# EAGLE board CT_schematic (EAGLE 7.6.0)

Size 100 x 80 mm. Coordinates in mm from the lower left corner, seen from the top.
Outline: 0,0 100,0 100,80 0,80 0,0
Copper layers (1*16): Top 0.035mm / dielectric 1.5mm / Bottom 0.035mm
Design rules "default": minimum track width 10mil, minimum drill 24mil, track to track 8mil, track to pad 8mil, pad to pad 8mil, via to via 8mil, smd to smd 8mil, copper to edge 40mil, drill to drill 8mil, minimum pad ring 10mil, minimum via ring 8mil, stop-mask expansion 4mil, vias tented up to drill 0mil, thermal gap 10mil

## Footprints (pad centres in the part's own frame; a part is rotated, then mirrored left to right if it is on the bottom)
C0603 = smd 0.8 x 0.8: 1 -0.762,0; 2 0.762,0
C0402 = smd 0.5 x 0.5: 1 -0.508,0; 2 0.508,0
C0805 = smd 1.2 x 1.3: 1 -1.016,0; 2 1.016,0
C1206 = smd 1.3 x 1.6: 1 -1.524,0; 2 1.524,0
L0603 = smd 0.8 x 0.8: 1 -0.762,0; 2 0.762,0
L0805 = smd 1.2 x 1.3: 1 -1.016,0; 2 1.016,0
R0603 = smd 0.8 x 0.8: 1 -0.762,0; 2 0.762,0
LQFP64 = smd 0.3 x 1.2: 1 -3.75,-5.75; 2 -3.25,-5.75; 3 -2.75,-5.75; 4 -2.25,-5.75; 5 -1.75,-5.75; 6 -1.25,-5.75; 7 -0.75,-5.75; 8 -0.25,-5.75; 9 0.25,-5.75; 10 0.75,-5.75; 11 1.25,-5.75; 12 1.75,-5.75; 13 2.25,-5.75; 14 2.75,-5.75; 15 3.25,-5.75; 16 3.75,-5.75; 33 3.75,5.75; 34 3.25,5.75; 35 2.75,5.75; 36 2.25,5.75; 37 1.75,5.75; 38 1.25,5.75; 39 0.75,5.75; 40 0.25,5.75; 41 -0.25,5.75; 42 -0.75,5.75; 43 -1.25,5.75; 44 -1.75,5.75; 45 -2.25,5.75; 46 -2.75,5.75; 47 -3.25,5.75; 48 -3.75,5.75 | smd 1.2 x 0.3: 17 5.75,-3.75; 18 5.75,-3.25; 19 5.75,-2.75; 20 5.75,-2.25; 21 5.75,-1.75; 22 5.75,-1.25; 23 5.75,-0.75; 24 5.75,-0.25; 25 5.75,0.25; 26 5.75,0.75; 27 5.75,1.25; 28 5.75,1.75; 29 5.75,2.25; 30 5.75,2.75; 31 5.75,3.25; 32 5.75,3.75; 49 -5.75,3.75; 50 -5.75,3.25; 51 -5.75,2.75; 52 -5.75,2.25; 53 -5.75,1.75; 54 -5.75,1.25; 55 -5.75,0.75; 56 -5.75,0.25; 57 -5.75,-0.25; 58 -5.75,-0.75; 59 -5.75,-1.25; 60 -5.75,-1.75; 61 -5.75,-2.25; 62 -5.75,-2.75; 63 -5.75,-3.25; 64 -5.75,-3.75
SOIC-8 = smd 1.6 x 0.6: 1 -2.7,1.905 | smd 1.55 x 0.6: 2 -2.7,0.635; 3 -2.7,-0.635; 4 -2.7,-1.905; 5 2.7,-1.905; 6 2.7,-0.635; 7 2.7,0.635; 8 2.7,1.905
SAMTEC_FTSH-105-01-L-DV-K = smd 0.762 x 2.794: 1 -2.54,-2.032; 2 -2.54,2.032; 3 -1.27,-2.032; 4 -1.27,2.032; 5 0,-2.032; 6 0,2.032; 7 1.27,-2.032; 8 1.27,2.032; 9 2.54,-2.032; 10 2.54,2.032
182-009-MALE = drill 1.194 pad 1.524 octagon: 1 -5.537,10.923; 2 -2.769,10.923; 3 0,10.923; 4 2.769,10.923; 5 5.537,10.923; 6 -4.153,8.08; 7 -1.384,8.08; 8 1.384,8.08; 9 4.153,8.08 | hole 3.048: -12.446,9.501; 12.446,9.501
ABS07-32.768KHZ-7-T = smd 1.1 x 2.4: 1 -2.5,0; 2 0,0
ABLS-25.000MHZ-B2F-T = smd 5.6 x 2.8: 1 -3.81,0; 2 5.69,0
TSOT-23-5 = smd 1.3 x 0.62: 1 -1.31,0.95; 2 -1.31,0; 3 -1.31,-0.95; 4 1.31,-0.95; 5 1.31,0.95
DFN8_2X3MC = smd 0.813 x 0.305: 1 -1.398,0.75; 2 -1.398,0.25; 3 -1.398,-0.25; 4 -1.398,-0.75; 5 1.398,-0.75; 6 1.398,-0.25; 7 1.398,0.25; 8 1.398,0.75 | smd 1.753 x 1.549: 9 0,0
JST-2-SMD = smd 1 x 4.6: 1 -1,-3.7; 2 1,-3.7 | smd 1.6 x 3.4: NC1 -3.4,1.5; NC2 3.4,1.5
FCI_10118193-0001LF = smd 0.4 x 1.35: 1 -1.3,2.675; 2 -0.65,2.675; 3 0,2.675; 4 0.65,2.675; 5 1.3,2.675 | smd 1.6 x 1.4: 6 -3.2,2.45; 7 3.2,2.45 | smd 1.9 x 1.9: 8 -1.2,0; 9 1.2,0 | hole 0.5: -3.3,0; 3.3,0
SON-6 = smd 0.55 x 0.3: 1 -0.355,0.5 | smd 0.52 x 0.3: 2 -0.37,0; 3 -0.37,-0.5; 4 0.37,-0.5; 5 0.37,0; 6 0.37,0.5
SW_4-1437565-2 = smd 1.4 x 2.1: 1 -2.23,4.55; 2 -2.23,-4.55; 3 2.23,4.55; 4 2.23,-4.55
LGM67K-G1J2-24-Z = smd 0.8 x 1.4: A -2,0; C 0,0
NC7SZ125M5X = smd 1.3 x 0.7: 1 -1.3,0.95; 2 -1.3,0; 3 -1.3,-0.95; 4 1.3,-0.95; 5 1.3,0.95
DUMMY_PACKAGE_135 = drill 0.3: 1 0,-1; 2 1.5,-1; 3 3,-1

## Placement (x,y rotation side)
C1  1e-06  [C0603]  -53.34,74.93 0 top  (outside the outline)
C2  1e-07  [C0603]  -57.15,74.93 0 top  (outside the outline)
C3  1e-07  [C0603]  -60.96,74.93 0 top  (outside the outline)
C4  1e-07  [C0603]  -64.77,74.93 0 top  (outside the outline)
C5  1e-07  [C0603]  -68.58,74.93 0 top  (outside the outline)
C6  1e-07  [C0603]  -72.39,74.93 0 top  (outside the outline)
C7  4.7e-06  [C0603]  -49.53,74.93 0 top  (outside the outline)
C8  1e-08  [C0603]  -15.24,80.01 0 top  (outside the outline)
C9  1e-06  [C0603]  -19.05,80.01 0 top  (outside the outline)
C10  1e-11  [C0402]  -49.53,80.01 0 top  (outside the outline)
C11  1e-11  [C0402]  -53.34,80.01 0 top  (outside the outline)
C12  1e-11  [C0402]  -57.15,80.01 0 top  (outside the outline)
C13  1e-11  [C0402]  -60.96,80.01 0 top  (outside the outline)
C14  1e-08  [C0402]  -64.77,80.01 0 top  (outside the outline)
C15  1e-07  [C0402]  -68.58,80.01 0 top  (outside the outline)
C16  1e-07  [C0402]  -72.39,80.01 0 top  (outside the outline)
C17  1e-05  [C0805]  -72.39,62.23 0 top  (outside the outline)
C18  1e-05  [C0805]  -15.24,69.85 0 top  (outside the outline)
C19  1e-07  [C0402]  -15.24,85.09 0 top  (outside the outline)
C20  1e-05  [C1206]  -48.26,62.23 0 top  (outside the outline)
C21  1e-05  [C1206]  -54.61,62.23 0 top  (outside the outline)
C22  1e-08  [C0402]  -19.05,85.09 0 top  (outside the outline)
C23  1e-08  [C0402]  -22.86,85.09 0 top  (outside the outline)
F1  240.0  [L0603]  -22.86,80.01 0 top  (outside the outline)
I1  2.2e-06  [L0805]  -20.32,69.85 0 top  (outside the outline)
R2  1000.0  [R0603]  -26.67,80.01 0 top  (outside the outline)
R4  4700.0  [R0603]  -30.48,80.01 0 top  (outside the outline)
R5  10000.0  [R0603]  -58.42,69.85 0 top  (outside the outline)
R6  10000.0  [R0603]  -63.5,69.85 0 top  (outside the outline)
R7  10000.0  [R0603]  -68.58,69.85 0 top  (outside the outline)
R8  10000.0  [R0603]  -15.24,74.93 0 top  (outside the outline)
R9  10000.0  [R0603]  -20.32,74.93 0 top  (outside the outline)
R10  10000.0  [R0603]  -25.4,74.93 0 top  (outside the outline)
R11  10000.0  [R0603]  -30.48,74.93 0 top  (outside the outline)
R12  5.0  [R0603]  -34.29,80.01 0 top  (outside the outline)
R13  120.0  [R0603]  -38.1,80.01 0 top  (outside the outline)
R14  470000.0  [R0603]  -38.1,69.85 0 top  (outside the outline)
R15  220000.0  [R0603]  -43.18,69.85 0 top  (outside the outline)
R16  1000000.0  [R0603]  -33.02,69.85 0 top  (outside the outline)
R17  10000.0  [R0603]  -35.56,74.93 0 top  (outside the outline)
R18  10000.0  [R0603]  -40.64,74.93 0 top  (outside the outline)
R19  9100.0  [R0603]  -41.91,80.01 0 top  (outside the outline)
R20  680000.0  [R0603]  -48.26,69.85 0 top  (outside the outline)
R21  120000.0  [R0603]  -53.34,69.85 0 top  (outside the outline)
R22  2000.0  [R0603]  -45.72,80.01 0 top  (outside the outline)
R23  10000.0  [R0603]  -45.72,74.93 0 top  (outside the outline)
U1  STM32F303R6T6  [LQFP64]  -53.34,29.21 0 top  (outside the outline)
U2  AT25080B-SSHL-T  [SOIC-8]  -58.42,41.91 0 top  (outside the outline)
U3  FTSH-105-01-L-DV-K  [SAMTEC_FTSH-105-01-L-DV-K]  -35.56,30.48 0 top  (outside the outline)
U4  SN65HVD230D  [SOIC-8]  -21.59,54.61 0 top  (outside the outline)
U5  182-009-113R531  [182-009-MALE]  -36.83,6.35 0 top  (outside the outline)
U6  ABS07-32.768KHZ-7-T  [ABS07-32.768KHZ-7-T]  -27.94,63.5 0 top  (outside the outline)
U7  ABLS-25.000MHZ-B2F-T  [ABLS-25.000MHZ-B2F-T]  -50.8,53.34 0 top  (outside the outline)
U8  ltc3406es5  [TSOT-23-5]  -25.4,68.58 0 top  (outside the outline)
U9  MCP73831T-2ACI/MC  [DFN8_2X3MC]  -38.1,83.82 0 top  (outside the outline)
U10  S2B-PH-SM4-TB(LF)(SN)  [JST-2-SMD]  -41.91,44.45 0 top  (outside the outline)
U11  10118193-0001LF  [FCI_10118193-0001LF]  -31.75,53.34 0 top  (outside the outline)
U12  TPS3895ADRYR  [SON-6]  -31.75,83.82 0 top  (outside the outline)
U13  4-1437565-2  [SW_4-1437565-2]  -27.94,43.18 0 top  (outside the outline)
U14  Q65110A2395  [LGM67K-G1J2-24-Z]  -36.83,62.23 0 top  (outside the outline)
U15  nc7sz125m5x  [NC7SZ125M5X]  -59.69,60.96 0 top  (outside the outline)
U16  nc7sz125m5x  [NC7SZ125M5X]  -66.04,60.96 0 top  (outside the outline)
U17  Dummy  [DUMMY_PACKAGE_135]  -29.21,85.09 0 top  (outside the outline)

## Library data of the parts
C1-C23 F1 I1 R2 R4-R23 U1-U17 = circuit_tree

## Nets
CLK_CRYSTAL_U1_3: C10.1 U1.3 U6.1
CLK_CRYSTAL_U1_4: C11.1 U1.4 U6.2
CLK_CRYSTAL_U1_5: C12.1 U1.5 U7.1
CLK_CRYSTAL_U1_6: C13.1 U1.6 U7.2
GND: C1.2 C2.2 C3.2 C4.2 C5.2 C6.2 C7.2 C8.2 C9.2 C10.2 C11.2 C12.2 C13.2 C14.2 C15.2 C16.2 C17.2 C18.1 C18.2 C19.2 C20.2 C21.2 C22.2 C23.2 R2.2 R5.2 R12.2 R14.2 R15.2 R19.2 R21.2 R22.2 U1.12 U1.18 U1.31 U1.47 U1.63 U2.4 U3.3 U3.5 U4.2 U5.5 U8.2 U9.6 U9.9 U10.2 U11.5 U11.6 U11.7 U11.8 U11.9 U12.2 U14.C U15.2 U15.3 U16.1 U16.3 U17.1
INPUT_USBPOWER_5V: C20.1 R23.2 U9.1 U9.2 U11.1
NET_U1_7: R4.1 U1.7 U16.4
NET_U1_13: C8.1 C9.1 F1.1 U1.13
NET_U1_60: R5.1 U1.60
NET_U1_61: U14.A
NET_U1_62: U13.3 U13.4
NET_U2_3: R6.1 U2.3
NET_U2_7: R8.1 U2.7
NET_U3_9: R12.1 U3.9
NET_U4_6: R13.2 U4.6
NET_U4_8: R14.1 U4.8
NET_U5_2: R13.2 U4.6 U5.2
NET_U5_3: R13.1 U4.7 U5.3
NET_U8_1: U8.1
NET_U8_3: I1.1 U8.3
NET_U8_5: R15.1 R16.1 U8.5
NET_U8_ATNET_3: I1.2 R16.2
NET_U9_5: R23.1 U9.5
NET_U9_8: R22.1 U9.8
NET_U12_1: R18.1 R19.1 U12.1
NET_U12_3: R20.2 R21.1 U12.3
NET_U12_4: R17.1 U12.4 U15.4 U16.2
NET_U13_1: R2.1 U13.1 U13.2
PROC_CAN_RX: U1.44 U4.4
PROC_CAN_TX: U1.45 U4.1
PROC_PC0: U1.8 U17.3
PROC_PC13: U1.2 U17.2
PROC_SPI1_MISO: U1.22 U2.2
PROC_SPI1_MOSI: U1.23 U2.5
PROC_SPI1_NSS: R7.1 U1.20 U2.1
PROC_SPI1_SCK: U1.21 U2.6
PROC_SYS_JTCK_SWCLK: R10.1 U1.49 U3.4
PROC_SYS_JTDO_TRACESWO: U1.55 U3.6
PROC_SYS_JTMS_SWDIO: R11.1 U1.46 U3.2
RST_OUT_U3_JTAG_RST_B: R9.1 U3.10 U15.1
VCC_S1_3V7: C17.1 C21.1 U8.4 U9.3 U9.4 U10.1
VCC_TIER1_3V3: C1.1 C2.1 C3.1 C4.1 C5.1 C6.1 C7.1 C14.1 C15.1 C16.1 C18.2 C19.1 C22.1 C23.1 F1.2 I1.2 R4.2 R6.2 R7.2 R8.2 R9.2 R10.2 R11.2 R16.2 R17.2 R18.2 R20.1 U1.1 U1.19 U1.32 U1.48 U1.64 U2.8 U3.1 U4.3 U12.6 U15.5 U16.5

## Tracks (layer width: path | path; a pad name or v marks a point on that pad's centre or on a via)
CLK_CRYSTAL_U1_3  (2 unrouted)
CLK_CRYSTAL_U1_4  (2 unrouted)
CLK_CRYSTAL_U1_5  (2 unrouted)
CLK_CRYSTAL_U1_6  (2 unrouted)
GND  (57 unrouted)
INPUT_USBPOWER_5V  (4 unrouted)
NET_U1_7  (2 unrouted)
NET_U1_13  (3 unrouted)
NET_U1_60  (1 unrouted)
NET_U1_62  (1 unrouted)
NET_U2_3  (1 unrouted)
NET_U2_7  (1 unrouted)
NET_U3_9  (1 unrouted)
NET_U4_6  (1 unrouted)
NET_U4_8  (1 unrouted)
NET_U5_2  (2 unrouted)
NET_U5_3  (2 unrouted)
NET_U8_3  (1 unrouted)
NET_U8_5  (2 unrouted)
NET_U8_ATNET_3  (1 unrouted)
NET_U9_5  (1 unrouted)
NET_U9_8  (1 unrouted)
NET_U12_1  (2 unrouted)
NET_U12_3  (2 unrouted)
NET_U12_4  (3 unrouted)
NET_U13_1  (2 unrouted)
PROC_CAN_RX  (1 unrouted)
PROC_CAN_TX  (1 unrouted)
PROC_PC0  (1 unrouted)
PROC_PC13  (1 unrouted)
PROC_SPI1_MISO  (1 unrouted)
PROC_SPI1_MOSI  (1 unrouted)
PROC_SPI1_NSS  (2 unrouted)
PROC_SPI1_SCK  (1 unrouted)
PROC_SYS_JTCK_SWCLK  (2 unrouted)
PROC_SYS_JTDO_TRACESWO  (1 unrouted)
PROC_SYS_JTMS_SWDIO  (2 unrouted)
RST_OUT_U3_JTAG_RST_B  (2 unrouted)
VCC_S1_3V7  (5 unrouted)
VCC_TIER1_3V3  (37 unrouted)